# Altium PCB Lantern_REV_B3.PcbDoc (part 2 of 2)
Units mm, origin at the board's own origin, x right, y up, seen from the top; angles counter-clockwise.
Board outline 55 x 135 mm, 4 copper layers (SIG/PWR1, GND1, GND2, SIG/PWR2), stack 1.527 mm thick; 136 components, 65 nets, 452 pads, 147 vias.
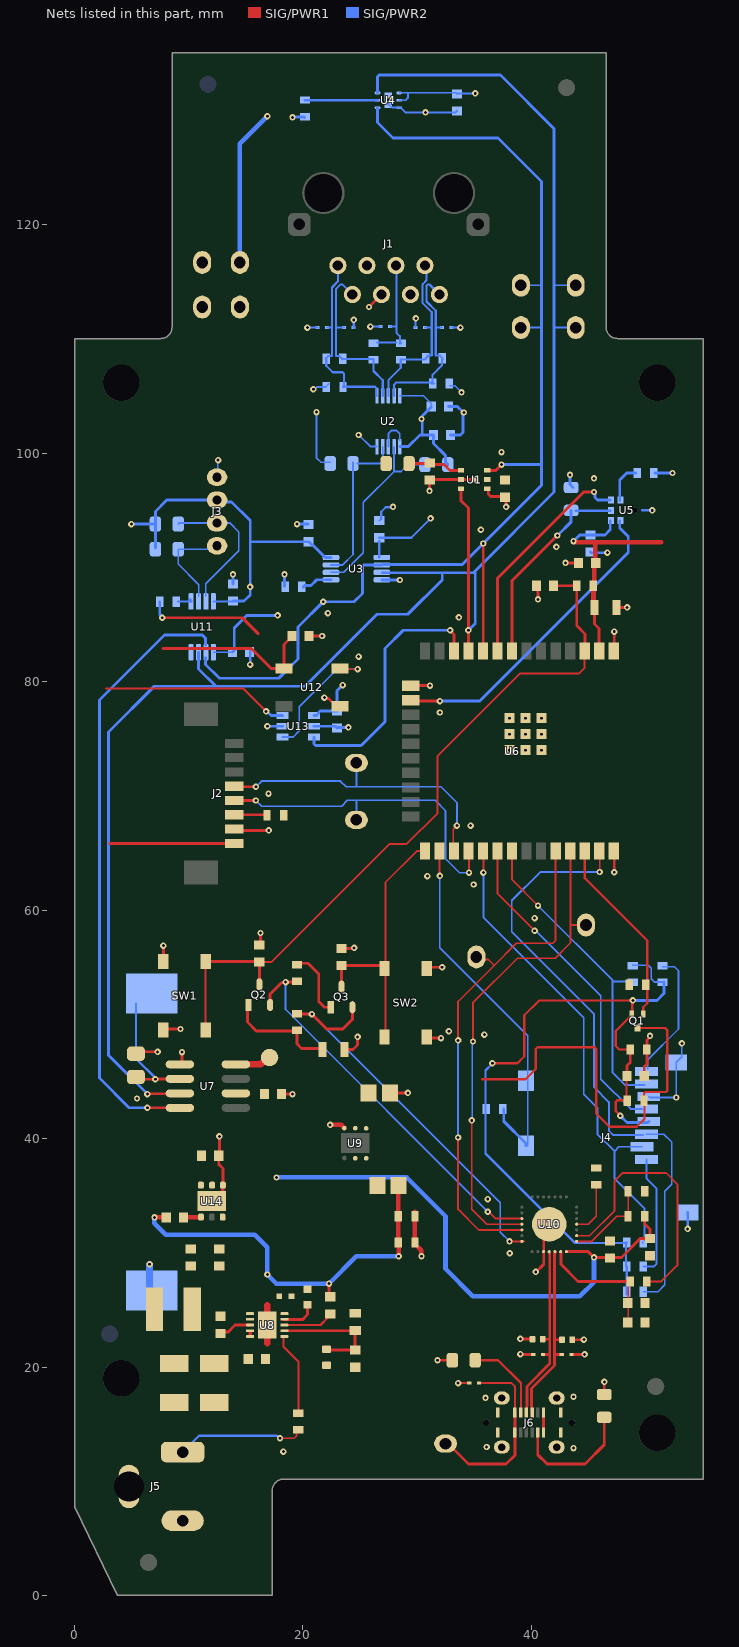
[diagram p4: the nets of this part, all layers, seen from the top]

## Part data
3V3 5V DGND DGND2 RXD0 RXD2 SCL SCL2 SDA SDA2 TXD2 TXDO VBUS: library part CMP-002-00083-1, "Conn Unshrouded Header HDR 1 POS 2.54mm Solder ST Thru-Hole Bag"
BAT1: library part CMP-002-00085-2, "battery holder cr1632"
C1 C2 C9 C13 C14 C22 C38: library part CMP-001-00098-2, "Ceramic Capacitor, Multilayer, Ceramic, 25V, 10% +Tol, 10% -Tol, X7R, 15% TC, 1uF, Surface Mount, 0603", Capacitor Type=Ceramic, Case/Package=0603, Max Operating Temperature=125°C, Min Operating Temperature=-55°C, Mounting Technology="Surface Mount", Pins=2, RoHS Compliant=Yes
C3 C4 C5 C6 C7 C8 C11 C12 C15 C18 C30 C31 C32 C33 C34 C35 C36: library part CMP-001-00099-4, "Ceramic Capacitor, Multilayer, Ceramic, 16V, 10% +Tol, 10% -Tol, X7R, 15% TC, 0.1uF, Surface Mount, 0603", Capacitor Type=Ceramic, Case/Package=0603, Max Operating Temperature=125°C, Min Operating Temperature=-55°C, Mounting Technology="Surface Mount", Pins=2, RoHS Compliant=Yes
C10 C40: library part CMP-001-00091-2, "Ceramic Capacitor, Multilayer, Ceramic, 10V, 20% +Tol, 20% -Tol, X7R, 15% TC, 22uF, Surface Mount, 0805", Capacitor Type=Ceramic, Case/Package=0805, Max Operating Temperature=125°C, Min Operating Temperature=-55°C, Mounting Technology="Surface Mount", Pins=2, RoHS Compliant=Yes
C16 C17: library part CMP-001-00089-3, "Ceramic Capacitor, Multilayer, Ceramic, 25V, 20% +Tol, 20% -Tol, X7R, 15% TC, 10uF, Surface Mount, 1210", Capacitor Type=Ceramic, Case/Package=1210, Max Operating Temperature=125°C, Min Operating Temperature=-55°C, Mounting Technology="Surface Mount", Pins=2, RoHS Compliant=Yes
C19 C20 C21: library part CMP-001-00095-2, "Ceramic Capacitor, Multilayer, Ceramic, 50V, 5% +Tol, 5% -Tol, C0G, 30ppm/Cel TC, 0.000022uF, Surface Mount, 0603", Capacitor Type=Ceramic, Case/Package=0603, Max Operating Temperature=125°C, Min Operating Temperature=-55°C, Mounting Technology="Surface Mount", Pins=2, RoHS Compliant=Yes
C23: library part CMP-001-00096-1, "Ceramic Capacitor, Multilayer, Ceramic, 50V, 5% +Tol, 5% -Tol, C0G, 30ppm/Cel TC, 0.0082uF, Surface Mount, 0603", Capacitor Type=Ceramic, Case/Package=0603, Max Operating Temperature=125°C, Min Operating Temperature=-55°C, Mounting Technology="Surface Mount", Pins=2, RoHS Compliant=Yes
C24 C25: library part CMP-001-00101-1, "Ceramic Capacitor, Multilayer, Ceramic, 16V, 10% +Tol, 10% -Tol, X7R, 15% TC, 10uF, Surface Mount, 0805", Capacitor Type=Ceramic, Case/Package=0805, Max Operating Temperature=125°C, Min Operating Temperature=-55°C, Mounting Technology="Surface Mount", Pins=2, RoHS Compliant=Yes
C26 C27: library part CMP-001-00073-5, "Chip Capacitor, 22pF +/-10%, 50V, 0402, Thickness 0.6 mm", Case/Package=0402, Max Operating Temperature=85°C, Min Operating Temperature=-55°C, Tolerance=10%, Voltage Rating=50V, Mounting Technology=SMT, Pins=2
C28 C29 C39: library part CMP-001-00076-6, "Chip Capacitor, 4.7µF +/-20%, 10V, 0603, Thickness 1 mm", Case/Package=0603, Max Operating Temperature=85°C, Min Operating Temperature=-55°C, Tolerance=10%, Voltage Rating=10V, Mounting Technology=SMT, Pins=2
C37: library part CMP-001-00100-1, "ESD SMD Comm C0G 0805 (2012Metric) Ceramic Capacitor 0.079Lx0.049W 2.00mmx1.25mm C0G NP0 ±10% 1000pF", Case/Package=0805, Tolerance=10%
D1 D2 D3 D4 D5 D6 D7 D8: library part CMP-004-00032-1, "Trans Voltage Suppressor Diode, 5V V(RWM), Bidirectional, 1 Element, Silicon", Max Operating Temperature=150°C, Min Operating Temperature=-55°C, Pins=2, RoHS Compliant=Yes
FM1 FM2 FM3 FM4 FM5 FM6: library part CMP-00030-00004-9, "fiducial marker 2D"
J1: library part CMP-002-00071-6, "Telecom and Datacom Connector, 8 Contact(s), Female, Straight, Solder Terminal, Locking, Jack", Max Operating Temperature=70°C, Min Operating Temperature=-40°C, Connector Type="TELECOM AND DATACOM CONNECTOR", Mounting Technology=Board, RoHS Compliant=Yes
J2: library part CMP-010-00028-3, "PLANTOWER 5003 CONNECTOR - Board Connector, 8 Contact(s), 1 Row(s), Male, Right Angle, 0.049 inch Pitch, Surface Mount Terminal, Locking, Natural Insulator, Receptacle", Max Operating Temperature=85°C, Min Operating Temperature=-40°C, Mounting Technology=Board, RoHS Compliant=Yes
J3: library part CMP-002-00076-3, "K30 cable connector"
J4: library part CMP-002-00080-1, "Micro SD card, push in, push out", Connector Type=PCB, RoHS Compliant=Yes
J5: library part CMP-002-00073-7, "16V, 2.5A, 2mm Dia", Max Current Rating=2.5A, Voltage Rating=16V, Connector Type=Circular,Power, Mounting Technology=Board, RoHS Compliant=Yes
J6: library part CMP-002-00086-1, "USB2.0, Type C, Vertical, Height 6.40mm, Dual Row Surface Mount"
L1: library part CMP-006-00024-1, "High Current Composite Inductor - PA5430/PA5431.XXXNLT and PM5430.XXXNLT, Up to 6.6 Apk", Current Rating=6.6A, Tolerance=20%
NT1: library part CMP-00030-00003-5
P1: library part CMP-00030-00002-1, "a pad to pull out pins"
Q1: library part CMP-013-00037-1, "P-Channel 20 V 600 mA 150 mW Surface Mount Mosfet - SOT-523"
Q2 Q3: library part CMP-013-00035-2, "Small Signal Bipolar Transistor, 1.5A I(C), 25V V(BR)CEO, 1-Element, NPN, Silicon", RoHS Compliant=Yes
R1: library part CMP-009-00185-2, "Fixed Resistor, Metal Glaze/thick Film, 0.25W, 4.7ohm, 150V, 1% +/-Tol, 200ppm/Cel, Surface Mount, 0805", Case/Package=0805, Max Operating Temperature=155°C, Min Operating Temperature=-55°C, Power=250mW, Tolerance=1%, Mounting Technology="Surface Mount", Pins=2, RoHS Compliant=Yes
R2 R3 R8 R9: library part CMP-009-00193-4, "Fixed Resistor, Metal Glaze/thick Film, 0.1W, 590ohm, 75V, 1% +/-Tol, 100ppm/Cel, Surface Mount, 0603", Case/Package=0603, Max Operating Temperature=155°C, Min Operating Temperature=-55°C, Power=100mW, Tolerance=1%, Mounting Technology="Surface Mount", Pins=2, RoHS Compliant=Yes
R4 R5 R34 R35 R43 R44: library part CMP-009-00191-2, "Fixed Resistor, Metal Glaze/thick Film, 0.125W, 5100ohm, 150V, 5% +/-Tol, 100ppm/Cel, Surface Mount, 0805", Case/Package=0805, Max Operating Temperature=155°C, Min Operating Temperature=-55°C, Power=125mW, Tolerance=5%, Mounting Technology="Surface Mount", Pins=2, RoHS Compliant=Yes
R6 R7: library part CMP-009-00194-4, "Fixed Resistor, Metal Glaze/thick Film, 0.1W, 110ohm, 75V, 1% +/-Tol, 100ppm/Cel, Surface Mount, 0603", Case/Package=0603, Max Operating Temperature=155°C, Min Operating Temperature=-55°C, Power=100mW, Tolerance=1%, Mounting Technology="Surface Mount", Pins=2, RoHS Compliant=Yes
R10 R11 R12 R14 R15 R19 R27 R33 R37 R39 R42: library part CMP-009-00204-2, "Fixed Resistor, Metal Glaze/thick Film, 0.1W, 10000ohm, 75V, 1% +/-Tol, 100ppm/Cel, Surface Mount, 0603", Case/Package=0603, Max Operating Temperature=155°C, Min Operating Temperature=-55°C, Power=100mW, Tolerance=1%, Mounting Technology="Surface Mount", Pins=2, RoHS Compliant=Yes
R13: library part CMP-009-00179-2, "Fixed Resistor, Metal Glaze/thick Film, 0.25W, 100000ohm, 200V, 1% +/-Tol, 100ppm/Cel, Surface Mount, 0805", Case/Package=0805, Max Operating Temperature=155°C, Min Operating Temperature=-55°C, Power=250mW, Tolerance=1%, Mounting Technology="Surface Mount", Pins=2, RoHS Compliant=Yes
R18 R30 R36: library part CMP-009-00006-8, "Chip Resistor, 0 Ohm, 0.1 W, -55 to 155 degC, 0603 (1608 Metric)", Case/Package=0603, Max Operating Temperature=155°C, Min Operating Temperature=-55°C, Power=100mW, Tolerance=5%, Voltage Rating=50V, Mounting Technology=SM, Pins=2, RoHS Compliant=True
R20 R41: library part CMP-009-00207-2, "Fixed Resistor, Metal Glaze/thick Film, 0.1W, 2000ohm, 75V, 1% +/-Tol, 100ppm/Cel, Surface Mount, 0603", Case/Package=0603, Max Operating Temperature=155°C, Min Operating Temperature=-55°C, Power=100mW, Tolerance=1%, Mounting Technology="Surface Mount", Pins=2, RoHS Compliant=Yes
R21 R22 R23 R24 R25 R26 R40: library part CMP-009-00197-3, "Fixed Resistor, Metal Glaze/thick Film, 0.33W, 47500ohm, 75V, 1% +/-Tol, 100ppm/Cel, Surface Mount, 0603", Case/Package=0603, Max Operating Temperature=155°C, Min Operating Temperature=-55°C, Power=250mW, Tolerance=1%, Mounting Technology="Surface Mount", Pins=2, RoHS Compliant=Yes
R28: library part CMP-009-00198-1, "Fixed Resistor, Metal Glaze/thick Film, 0.25W, 124000ohm, 75V, 1% +/-Tol, 100ppm/Cel, Surface Mount, 0603", Tolerance=1%
R29: library part CMP-009-00199-1, "Fixed Resistor, Metal Glaze/thick Film, 0.33W, 22100ohm, 75V, 1% +/-Tol, 100ppm/Cel, Surface Mount, 0603", Case/Package=0603, Max Operating Temperature=155°C, Min Operating Temperature=-55°C, Power=250mW, Tolerance=1%, Mounting Technology="Surface Mount", Pins=2, RoHS Compliant=Yes
R38: library part CMP-009-00196-2, "Fixed Resistor, Metal Glaze/thick Film, 0.1W, 22100ohm, 75V, 1% +/-Tol, 100ppm/Cel, Surface Mount, 0603", Case/Package=0603, Max Operating Temperature=155°C, Min Operating Temperature=-55°C, Power=100mW, Tolerance=1%, Mounting Technology="Surface Mount", Pins=2, RoHS Compliant=Yes
SW1 SW2: library part CMP-011-00013-2, "Switch Tactile N.O. SPST Round Button Gull Wing 0.05A 12VDC 200000Cycles 2.45N SMD T/R"
U1: library part CMP-010-00025-3, "Air Quality Gas Sensor Voc/no"
U2: library part CMP-00024-00007-3, "IC Redriver I2C 2CH 10TSSOP"
U3 U11: library part CMP-00024-00006-2, "Interface Circuit, PDSO8", Case/Package=TSSOP, Max Operating Temperature=85°C, Min Operating Temperature=-40°C, Pins=8, RoHS Compliant=Yes
U4: library part CMP-010-00029-2, "Analog Circuit, 1 Func, 1 Channel, PDSO6", Case/Package=HVSON, Max Operating Temperature=85°C, Max Supply Voltage=3.6V, Min Operating Temperature=-40°C, Min Supply Voltage=1.6V, Nominal Supply Voltage=3.3V, Pins=6, RoHS Compliant=Yes
U5: library part CMP-010-00026-5, "MICROPHONE MEMS DIGITAL I2S OMNI"
U6: library part CMP-020-00023-6, "WiFi-Module 802.11/BT 2, 4-2, 5GHz 150Mb/s"
U7: library part CMP-00023-00005-1, "Real Time Clock, Non-Volatile, 1 Timer(s), CMOS, PDSO8", Case/Package=SOP, Max Operating Temperature=85°C, Min Operating Temperature=-45°C, Pins=8, RoHS Compliant=Yes
U8: library part CMP-019-00051-7, "Switching Regulator, Current-mode, 4A, 650kHz Switching Freq-Max, PDSO10", Case/Package=HVSON, Frequency=650kHz, Max Operating Temperature=85°C, Max Supply Voltage=18V, Min Operating Temperature=-40°C, Pins=10, RoHS Compliant=Yes
U9: library part CMP-019-00050-2, "Fixed Positive LDO Regulator, 3.3V, 0.25V Dropout", Case/Package=HVSON, Max Supply Voltage=6V, Pins=6, RoHS Compliant=Yes
U10: library part CMP-00024-00008-3, "USB Bus Controller, CMOS"
U12: library part CMP-00026-00001-3, "WS2812B 5050 RGB LED WITH INTEGRATED DRIVER CHIP PACK OF 10"
U13: library part CMP-015-00009-1, "Bus Transceiver, LVC/LCX/Z Series, 1-Func, 1-Bit, True Output, CMOS, PDSO6", Case/Package=LSSOP, Max Operating Temperature=125°C, Max Supply Voltage=5.5V, Min Operating Temperature=-40°C, Min Supply Voltage=1.65V, Nominal Supply Voltage=3.3V, Pins=6, RoHS Compliant=Yes
U14: library part CMP-019-00053-2, "Fixed Positive LDO Regulator, 5V, 0.6V Dropout", RoHS Compliant=Yes

## Free pads (board coordinates)
  round 3.2 hole 3.2 unplated: MTH(4.098,19.031) MTH(4.098,106.151) MTH(51.018,14.231) MTH(51.018,106.151)

## Via types
v1: diameter 0.56/0.56/0.56/0.56 (per signal layer), hole 0.255, SIG/PWR1 to SIG/PWR2, 82 vias
v2: diameter 0.555, hole 0.255, SIG/PWR1 to SIG/PWR2, 29 vias
v3: diameter 0.56, hole 0.255, SIG/PWR1 to SIG/PWR2, 25 vias
v4: diameter 0.555/0.555/0.555/0.555 (per signal layer), hole 0.255, SIG/PWR1 to SIG/PWR2, 11 vias

## Nets (pads, with @x,y where several pads share a name; then routed paths per layer and width w, separated by ;. In a path a pad name is that pad's centre, name@x,y a point inside that pad or via, vN(x,y) a via of type N, cw(c..) or ccw(c..) an arc to the next point about the centre after c; other vN are vias at no path point)
3.3V: 3V3.1 C2.2 C5.2 C6.2 C7.2 C8.2 C10.2 C14.2 C24.2 C34.2 C36.1 Q1.3 R1.2 R10.1 R11.1 R12.1 R14.1 R15.2 R18.2 R19.1 R33.1 U1.5 U3.1 U4.1 U4.2 U5.5 U6.2 U7.2 U9.1 U9.2 U11.1 U13.1 U13.5 | length 113.7
  SIG/PWR1 w0.2: 35.7,45.2 39.5,45.2 40.4,46.1 40.4,47.854 40.546,48 45.554,48 45.7,47.854 45.7,42.2 46.857,41.043 49.244,41.043 49.925,41.725 R18.2@49.925,43.323 ; Q1.3@49.3,49.68 51.72,49.68 51.9,49.5 51.9,44.192 51.783,44.075 49.992,44.075 49.875,43.957 R18.2@49.875,43.323
  SIG/PWR1 w0.25: v3(7.7,85.6) 14.7,85.6 16.1,84.2 ; C10.2@45.55,86.5 45.55,85.061 45.948,84.663 U6.2@45.948,82.671
  SIG/PWR1 w0.4: v1@43.7,92.2 51.4,92.2 ; C10.2@45.55,86.5 45.454,86.596 45.454,88.371 R15.2@45.425,88.4 45.535,88.51 45.535,90.285 C8.2@45.65,90.4 45.616,90.434 45.616,92.1
  SIG/PWR2 w0.153: U11.1@12.175,82.575 C34.2@13.825,82.575 ; C7.2@33.5,131.45 33.55,131.5 v2(35.1,131.5)
  SIG/PWR2 w0.17: U4.2@28.45,130.9 29,130.9 29.2,131.1 29.2,131.56 ; U4.1@28.472,131.56 29.2,131.56 ; C7.2@33.5,131.45 33.39,131.56 29.2,131.56
  SIG/PWR2 w0.2: U3.1@26.7,90.9 C5.2@26.7,92.3 ; C5.2@26.7,92.6 29.5,92.6 v2(31.2,94.3)
  SIG/PWR2 w0.25: R33.1@7.48,86.995 7.48,85.903 7.7,85.684 v3(7.7,85.6) ; C34.2@13.85,82.6 14,82.75 14,84.7 15.1,85.8 v3(17.8,85.8) ; v3(16.9,76.1) U13.5@18.225,76.1 ; R11.1@18.4,88.35 v3(18.4,89.4) ; v2(19.1,129.4) 19.137,129.437 20.112,129.437 R12.1@20.15,129.4 ; U13.1@20.975,77.05 21.2,77.05 21.375,77.225 21.375,77.297 21.521,77.443 C36.1@22.993,77.443 ; C36.1@23,77.45 23,79.2 v3(23.5,79.7) ; v1(43.7,92.3) 43.703,92.3 44.253,92.85 C6.2@45.2,92.85 46.46,92.85 46.925,93.315 U5.5@46.925,94.068 ; R14.1@50.851,98.271 v2@52.372,98.271
  SIG/PWR2 w0.4: 3V3.1@14.5,116.7 14.5,127.1 v3(16.9,129.5)
  other v2: 52.375,98.274
3.3V_SD: C13.2 J4.4 Q1.2 R18.1 R20.1 R21.2 R22.2 R23.2 R24.2 R25.2 R26.2 | length 68.5
  SIG/PWR1 w0.153: R18.1@48.323,43.425 48.35,43.398 R18.1@48.425,43.323 ; v2@48.85,52.05 v2(48.9,52.1)
  SIG/PWR1 w0.2: v2(36.6,46.6) 38.8,46.6 39.4,47.2 39.4,50.8 40.7,52.1 v2(48.9,52.1) ; v2(47.8,42) 47.413,42.387 47.413,43.229 47.53,43.346 R18.1@48.323,43.346 ; R18.1@48.35,43.323 48.35,43.398 C13.2@48.35,45.48 ; R20.1@48.4,47.8 47.7,47.8 47.4,48.1 47.4,49.42 48.85,50.87 v2@48.85,52.05 ; R20.1@48.513,47.638 R20.1@48.675,47.8
  SIG/PWR1 w0.25: C13.2@48.399,45.481 48.399,46.4 48.675,46.676 R20.1@48.675,47.8
  SIG/PWR2 w0.153: R23.2@48.9,55.2 48.934,55.166 50.24,55.166 50.5,54.906 50.5,54 50.797,53.703 R24.2@51.447,53.703
  SIG/PWR2 w0.2: v2@36.6,46.559 36,45.959 36,38.7 43.829,30.871 48.3,30.871 R25.2@48.3,28.8 ; R21.2@48.229,30.9 R21.2@48.375,30.9 ; R22.2@48.375,26.37 R22.2@48.375,26.6 R25.2@48.375,28.8
  SIG/PWR2 w0.25: v2(47.8,42) 48.4,41.4 50.213,41.4 J4.4@50.298,41.485 ; v2(48.9,52.1) 51,52.1 51.629,52.729 R24.2@51.629,53.725
  SIG/PWR2 w0.4: v2@36.6,46.559 v2(36.6,46.6)
5V: 5V.1 C3.2 C4.2 C29.2 C31.2 C32.2 C33.2 C35.1 C39.2 D3.2 J1.3 J1.4 J1.6 J2.8 J3.3 R2.2 R3.2 R4.2 R5.2 R38.1 R43.2 R44.2 U2.1 U2.3 U2.10 U3.8 U10.7 U11.8 U12.1 U13.6 U14.2 U14.3 | length 152.4
  SIG/PWR1 w0.153: C31.2@50.6,31.35 C31.2@50.65,31.3
  SIG/PWR1 w0.2: 2.8,79.4 14.8,79.4 v3(16.8,77.4)
  SIG/PWR1 w0.25: 3.1,65.85 J2.8@14,65.85 ; 7.777,82.9 15.5,82.9 17.25,81.15 U12.1@18.35,81.15 18.35,83.25 19.05,83.95 C35.1@19.05,84 ; U10.7@43.079,30.102 44.998,30.102 v2(45.5,29.6) 47.9,29.6 49.55,31.25 C31.2@50.4,31.25 50.4,32.062 49.941,32.521 49.941,33.184 R38.1@49.925,33.2
  SIG/PWR2 w0.153: U11.8@12.175,87.025 13.875,87.025 C33.2@13.9,87.05 ; v2(21.2,103.6) 21.2,99.6 21.6,99.2 R4.2@22.4,99.2 ; U2.3@27.5,100.575 27.5,101.7 27.8,102 28.2,102 28.5,101.7 U2.1@28.5,101.1 ; U2.10@28.5,105.025 30.575,105.025 31.25,104.35 C32.2@31.25,104.3
  SIG/PWR2 w0.16: J1.4@27.843,116.516 27.892,116.565 28.024,116.565 J1.4@28.157,116.432
  SIG/PWR2 w0.188: R2.2@26.5,109.7 R3.2@28.2,109.7 ; D3.2@27.645,111.084 28.185,111.084 28.201,111.1 ; J1.4@28.157,116.432 28.201,116.388 28.201,111.1 ; R3.2@28.475,109.625 R3.2@28.6,109.625 ; R3.2@28.537,109.687 28.5,109.725 28.5,110.242 28.201,110.542 28.201,111.1
  SIG/PWR2 w0.25: v3(5,93.8) R44.2@7.1,93.8 ; R43.2@7.1,91.7 R44.2@7.1,93.8 ; C33.2@13.9,87.05 14.85,87.05 15.4,87.6 v3(15.4,88.3) 15.4,92.2 ; v3(16.8,77.4) 16.884,77.4 17.259,77.025 18.2,77.025 U13.6@18.225,77.05 ; C4.2@20.5,92.25 15.45,92.25 15.4,92.2 ; C4.2@20.6,92.2 20.825,91.975 20.875,91.975 21.975,90.875 U3.8@22.475,90.875 ; U2.1@28.5,100.575 29.236,100.575 30.261,101.6 30.458,101.6 ; C32.2@31.25,104.1 31.25,104.05 30.458,103.258 30.458,103.058 v2(30.4,103) 30.458,102.942 30.458,101.6 ; R5.2@32.7,99 32.483,99.217 32.483,99.817 31.45,100.85 C3.2@31.45,101.6 30.458,101.6 ; R44.2@7.1,93.8 7.1,94.9 8.1,95.9 J3.3@12.5,95.9 12.675,95.725 13.775,95.725 15.4,94.1 15.4,92.2
  SIG/PWR2 w0.4: v3(17.7,36.6) 29.1,36.6 32.5,33.2 32.5,28.6 34.9,26.2 44.266,26.2 45.5,27.434 v2(45.5,29.6)
5V_BRRL: C19.1 C20.1 C21.1 C25.2 C38.2 L1.2 R28.1 U9.5 U9.6 U14.4 U14.6 | length 1.3
  SIG/PWR1 w0.4: C38.2@9.8,33.1 9.815,33.115 11.075,33.115 U14.4@11.091,33.131
BCLK: U5.4 U6.16 | length 27.7
  SIG/PWR1 w0.25: U6.16@29.245,78.3 v2(32,78.3)
  SIG/PWR2 w0.25: v2(32,78.3) 35.5,78.3 48.5,91.3 48.5,92.7 47.747,93.453 U5.4@47.747,94.068
CD: J4.9 J4.10 R26.1 U6.26 | length 33
  SIG/PWR1 w0.153: v2@31.978,63.022 U6.26@31.978,65.171
  SIG/PWR1 w0.17: v2@31.978,63.022 v2(32,63)
  SIG/PWR2 w0.153: v2(32,63) 32,56.7 39.698,49.002 39.698,45.075 J4.10@39.698,39.375
  SIG/PWR2 w0.25: R26.1@37.6,42.6 37.6,41.523 39.548,39.575 J4.10@39.548,39.375
CS_MIC: U5.1 U6.9 | length 19.9
  SIG/PWR1 w0.25: U6.9@37.058,82.671 37.058,89.058 44.6,96.6 v2(45.5,96.6)
  SIG/PWR2 w0.17: v2(45.5,96.6) v2@45.574,96.526 ; U5.1@46.887,95.907 U5.1@46.925,95.869
  SIG/PWR2 w0.25: v2@45.574,96.526 45.574,96.126 45.793,95.907 U5.1@46.887,95.907
CS_SDCARD: J4.2 R21.1 U6.29 | length 42.5
  SIG/PWR1 w0.153: v2(35.816,63.279) U6.29@35.816,65.143
  SIG/PWR2 w0.17: v2(35.816,63.279) 35.816,59.384 44.6,50.6 44.6,43.9 45.8,42.7 45.8,40.4 47.3,38.9 ; J4.2@49.698,39.285 47.685,39.285 47.3,38.9 ; R21.1@49.75,30.9 R21.1@49.775,30.925 ; R21.1@49.9,31.1 49.9,33.9 47.3,36.5 47.3,38.9
D_N: C27.2 D7.2 J6.A7 U10.5 | length 16.3
  SIG/PWR1 w0.246: J6.A7@40.076,16.005 40.048,16.032 40.048,16.574 40.025,16.597 40.025,18.132 42.028,20.134 42.028,21.1 ; U10.5@42.079,30.102 42.075,30.097 42.075,29.948 42.031,29.904 42.031,25.138 42.028,25.134 42.028,22.4 ; D7.2@42.674,21.104 42.032,21.104 42.028,21.1 ; C27.2@42.695,22.388 42.04,22.388 42.028,22.4 ; 42.028,21.1 42.028,22.4
D_P: C26.2 D6.2 J6.A6 U10.4 | length 16.3
  SIG/PWR1 w0.246: J6.A6@39.576,16.005 39.603,16.032 39.603,16.574 39.626,16.597 39.626,18.297 41.628,20.3 41.628,21.1 ; D6.2@41.021,21.104 41.624,21.104 41.628,21.1 ; C26.2@41.056,22.4 C26.2@41.014,22.442 41.587,22.442 41.628,22.4 ; U10.4@41.577,30.097 41.582,30.093 41.582,29.952 41.632,29.902 41.632,25.303 41.628,25.3 41.628,22.4 ; 41.628,21.1 41.628,22.4
DGND: BAT1.2 C1.1 C2.1 C3.1 C4.1 C5.1 C6.1 C7.1 C8.1 C9.1 C10.1 C11.2 C12.2 C13.1 C14.1 C24.1 C26.1 C27.1 C28.1 C29.1 C30.1 C31.1 C32.1 C33.1 C34.1 C35.2 C36.2 C37.1 C39.1 C40.1 D1.1 D2.1 D3.1 D4.1 D5.1 D6.1 D7.1 D8.1 DGND2.1 DGND.1 J1.5 J2.7 J3.4 J4.6 J4.11 J4.12 J6.A1 J6.A12 J6.B1 J6.B12 J6.SH1 J6.SH2 J6.SH3 J6.SH4 R8.1 R9.1 R13.1 R20.2 R30.2 R34.1 R35.1 R36.2 R37.1 R40.1 SW1.1 SW1.2 SW2.1 SW2.2 U1.2 U1.4 U1.7 U2.5 U3.4 U4.3 U4.7 U5.3 U6.1 U6.15 U6.38 U6.39_1 U6.39_2 U6.39_3 U6.39_4 U6.39_5 U6.39_6 U6.39_7 U6.39_8 U6.39_9 U7.5 U9.3 U10.3 U10.29 U11.4 U12.3 U13.2 U14.1 U14.7 | length 114
  SIG/PWR1 w0.153: v1(33.6,18.6) D8.1@34.58,18.6 ; v1(36,17.3) v1@36.005,17.295 ; v1(36.1,13) v1@36.105,12.995
  SIG/PWR1 w0.2: C37.1@5.4,47.432 5.665,47.432 5.833,47.6 v1(7.3,47.6) ; v1(31.8,20.6) R35.1@33.1,20.6
  SIG/PWR1 w0.246: v1@39.058,22.454 C26.1@40.103,22.454 ; v1@39.081,21.104 D6.1@40.181,21.104 ; D7.1@43.514,21.104 v1@44.669,21.104 ; C27.1@43.602,22.395 v1@44.609,22.395
  SIG/PWR1 w0.25: SW1.1@7.8,49.5 7.9,49.6 v1(9.3,49.6) ; SW1.2@7.8,55.5 v1(7.8,56.9) ; U7.5@9.25,46.505 9.428,46.683 v1(9.428,47.572) ; U14.7@12.041,34.528 12.263,34.528 U14.7@13.013,35.278 ; v1(12.7,40.2) 12.7,38.55 C39.1@12.65,38.5 12.65,37.75 13.013,37.387 U14.1@13.013,35.925 ; J2.7@14,67.1 14.122,66.978 v1(17.028,66.978) ; C11.2@16.2,56.95 16.3,57.05 v1(16.3,58) ; C14.1@18.027,43.9 C14.1@18.15,43.9 v1(19.1,43.9) ; C35.2@20.55,84 v1(21.7,84) ; v1(21.9,78.6) 21.959,78.541 22.259,78.541 22.95,77.85 U12.3@23.25,77.85 ; C12.2@23.4,56.65 v1@24.45,56.65 ; C40.1@23.65,47.8 24.4,47.8 24.8,48.2 v1(24.8,48.9) ; v1(25.8,112.8) 25.803,112.8 26.887,113.884 J1.5@26.887,113.892 ; C24.1@27.626,44 v1(29.2,44) ; U6.15@29.335,79.7 29.38,79.655 v1(31.145,79.655) ; SW2.2@30.85,48.9 31.079,48.671 31.079,48.704 31.175,48.8 v1(32.1,48.8) ; SW2.1@30.9,54.675 30.9,54.725 31.175,55 v1(32.2,55) ; v1(31.1,96.7) 31.1,97.64 C1.1@31.108,97.648 C1.1@31.108,97.771 ; C1.1@31.181,97.698 U1.2@33.858,97.698 U1.7@35.008,97.698 ; U1.4@36.236,96.823 36.236,96.417 36.455,96.198 C2.1@37.708,96.198 ; C2.1@37.708,96.271 37.8,96.179 v1(37.8,95.3) ; v1(39.046,22.465) v1@39.058,22.454 ; v1(39.054,21.131) v1@39.081,21.104 ; C26.1@40.103,22.454 C26.1@40.114,22.442 ; v4(40.4,28.332) 40.431,28.332 41.1,29 41.1,32 U10.29@41.6,32.5 ; C9.1@40.573,88.4 40.6,88.373 v1(40.6,87.2) ; v1(43,90.4) C8.1@44.15,90.4 ; C27.1@43.595,22.388 C27.1@43.602,22.395 ; v1@44.609,22.395 v1(44.617,22.402) ; v1@44.669,21.104 v1(44.673,21.108) ; R34.1@46.4,17.6 v1(46.4,18.7) ; U6.1@47.218,82.671 47.269,82.722 v1(47.269,84.378) ; v1(47.27,63.316) U6.38@47.27,64.812 ; C10.1@47.45,86.5 v1(48.4,86.5) ; R40.1@49.85,35.4 R40.1@49.925,35.4 R40.1@50,35.4 ; C28.1@49.9,23.9 C28.1@49.9,23.95 ; C30.1@49.9,25.55 C30.1@49.95,25.6 ; C13.1@49.9,45.48 49.9,46.3 50.125,46.525 R20.2@50.125,47.8 50.125,48.641 50.4,48.916 v1(50.4,49)
  SIG/PWR1 w0.3: U14.7@13.013,35.278 U14.1@13.013,35.925
  SIG/PWR1 w0.4: v1(22.4,41.2) 23.371,41.2 U9.3@23.65,40.921 ; R30.2@29.825,33.6 29.79,33.565 29.79,30.935 R36.2@29.825,30.9 29.825,30.775 30.369,30.231 30.369,29.731 v1(30.4,29.7)
  SIG/PWR2 w0.153: J3.4@12.5,97.9 12.55,97.95 12.55,99.35 v1(12.6,99.4) ; C4.1@20.45,93.8 C4.1@20.5,93.75 ; v1(20.936,105.603) 21.046,105.603 21.243,105.8 22.001,105.8 R8.1@22.26,106.059 ; D1.1@24.47,110.99 D1.1@24.5,110.96 ; v1(24.9,101.6) 25.9,100.6 26.427,100.6 26.451,100.575 U2.5@26.5,100.575 ; C5.1@26.7,94.1 C5.1@26.869,94.269 ; U4.7@27.5,130.9 27.5,130.55 27.787,130.263 28.437,130.263 U4.3@28.45,130.25 28.575,130.25 28.991,129.834 v1(30.744,129.834) 33.384,129.834 C7.1@33.5,129.95 C7.1@33.45,130 ; v1@27.878,95.278 v1(27.9,95.3) ; v1@29.88,111.78 v1(29.9,111.8) ; R9.1@32.9,105.9 33.332,105.9 v1(33.9,105.332) ; J4.6@50.298,43.685 50.383,43.6 v1(52.7,43.6) 52.7,46.673 J4.11@52.698,46.675 53.187,47.164 v1(53.187,48.335)
  SIG/PWR2 w0.188: v1(20.4,111) D2.1@21.28,111 ; D1.1@24.47,110.99 v1(24.47,111.67) ; v1(25.926,111.084) D3.1@26.806,111.084 ; D5.1@29.88,111 v1@29.88,111.78 ; D4.1@33.02,111 v1(33.8,111)
  SIG/PWR2 w0.2: C5.1@26.869,94.269 26.869,94.869 27.278,95.278 v1@27.878,95.278 ; U5.3@49.722,95.015 50.585,95.015 v1(50.6,95)
  SIG/PWR2 w0.25: C33.1@13.9,88.55 v1(13.9,89.4) ; v1(15.4,81.5) C34.1@15.4,82.65 ; v1(19.5,93.8) C4.1@20.45,93.8 ; U13.2@20.975,76.1 22.85,76.1 C36.2@23,75.95 23.05,76 v1(24,76) ; U3.4@26.925,88.925 26.937,88.912 28.487,88.912 v1(28.5,88.9) ; C32.1@32.75,104.1 33.529,104.1 34.061,103.568 v1(34.1,103.568) 34.041,103.509 34.041,101.841 33.8,101.6 C3.1@32.95,101.6 ; v1(43.4,98.1) 43.4,97.25 R13.1@43.65,97 ; C6.1@45.2,91.35 45.258,91.292 v1(46.663,91.292) ; J4.12@53.698,33.525 J4.12@53.698,33.525 v1(53.7,32.1)
  SIG/PWR2 w0.6: v1(6.6,29) 6.6,26.9 BAT1.2@6.8,26.7
  other v1: 18.3,12.6 43.7,12.9 43.7,17.4 38.124,29.965 36.2,34.7 5.489,43.511 35.9,49.1 32.8,49.4 24.5,56.7 40.3,59.3 34.962,62.242 30.907,62.983 34.7,67.4 17,70.2 32,77.3 24.9,82.2 33.669,85.629 22.2,86 42.2,91.8 35.6,93.3 45.5,97.8 37.4,100.1
  other v4: 38.1,74 39.5,74 40.9,74 38.1,75.4 39.5,75.4 40.9,75.4 38.1,76.8 39.5,76.8 40.9,76.8 27.502,130.945
DTR: Q3.2 R39.2 U10.28 | length 35.1
  SIG/PWR1 w0.153: v2(38.1,31) 39.375,31
  SIG/PWR1 w0.25: R39.2@19.5,50.925 19.512,50.912 20.787,50.912 22.1,49.6 23.5,49.6 24.35,50.45 Q3.2@24.35,51.499
  SIG/PWR2 w0.153: v2(20.8,50.9) 37.3,34.4 37.3,31.8 v2(38.1,31)
ENABLE: C9.2 C11.1 Q2.3 R15.1 SW1.3 SW1.4 U6.3 | length 64.2
  SIG/PWR1 w0.17: SW1.3@11.5,49.5 SW1.4@11.5,55.5 ; C11.1@16.2,55.45 17.25,55.45 27.6,65.8 29.1,65.8 31.8,68.5 31.8,73.5 39,80.7 44.16,80.7 44.678,81.218 U6.3@44.678,82.671
  SIG/PWR1 w0.25: SW1.4@11.5,55.5 16.15,55.5 C11.1@16.2,55.45 ; Q2.3@16.2,53.501 C11.1@16.2,55.32 ; C9.2@41.827,88.4 R15.1@43.85,88.4 ; R15.1@43.991,88.384 43.991,84.909 44.716,84.184 44.716,82.814 U6.3@44.88,82.65
GND: C23.1 NT1.2 R29.1 U8.5
IO0: C12.1 Q3.3 SW2.3 SW2.4 U6.25 | length 24.6
  SIG/PWR1 w0.153: SW2.4@27.245,48.7 27.245,54.9 27.245,62.445 29.971,65.171 U6.25@30.505,65.171
  SIG/PWR1 w0.17: U6.25@30.505,65.105 30.708,65.105 U6.25@31.065,65.105 ; U6.25@30.505,65.171 U6.25@30.708,65.171
  SIG/PWR1 w0.25: Q3.3@23.4,53.301 C12.1@23.4,55.15 26.9,55.15 SW2.3@27.15,54.9
LED: U6.12 U13.3 | length 22.5
  SIG/PWR1 w0.153: v3@32.9,84.476 v3(32.9,84.5)
  SIG/PWR1 w0.25: v3@32.9,84.476 33.248,84.128 U6.12@33.248,82.671
  SIG/PWR2 w0.25: U13.3@20.975,75.15 20.975,74.562 21.121,74.416 25.116,74.416 27.2,76.5 27.2,82.9 28.8,84.5 v3(32.9,84.5)
MISO: J4.7 R23.1 U6.31 | length 28.1
  SIG/PWR1 w0.153: U6.31@38.328,65.171 38.328,62.672 v2(40.6,60.4)
  SIG/PWR2 w0.153: v2(40.6,60.4) 47.1,53.9 47.25,53.75 R23.1@48.9,53.75
  SIG/PWR2 w0.17: 47.1,53.9 47.1,45.8 48.2,44.7 J4.7@49.9,44.7
MOSI: J4.3 R22.1 U6.37 | length 54.5
  SIG/PWR1 w0.153: v2(45.991,63.338) U6.37@45.991,64.9
  SIG/PWR2 w0.153: R22.1@49.825,26.6 51.1,26.6 51.7,27.2 51.7,35.4 52.3,36 52.3,39.7 51.615,40.385 J4.3@50.098,40.385
  SIG/PWR2 w0.17: v2(45.991,63.338) 40.793,63.338 38.3,60.846 38.3,58.1 45.5,50.9 45.5,44.5 46.8,43.2 46.8,40.7 47.2,40.3 J4.3@49.8,40.3
NetBAT1_1: BAT1.1 C37.2 U7.6 | length 11.3
  SIG/PWR1 w0.25: C37.2@5.4,45.4 5.6,45.2 v3(7.1,45.2) 7.118,45.218 9.233,45.218 U7.6@9.25,45.235
  SIG/PWR2 w0.2: BAT1.1@5.4,51.8 5.4,47 7.1,45.3 v3(7.1,45.2)
NetC1_2: C1.2 R1.1 U1.1 | length 4.7
  SIG/PWR1 w0.25: R1.1@29.308,99.098 C1.2@31.035,99.098 ; C1.2@31.108,99.025 32.375,99.025 32.5,98.9 32.902,98.498 U1.1@33.858,98.498 U1.1@33.84,98.516
NetC15_1: C15.1 L1.1 U8.6 U8.7
NetC15_2: C15.2 U8.8 | length 3
  SIG/PWR1 w0.254: C15.2@12.8,22.95 12.932,23.082 13.482,23.082 14.079,23.679 U8.8@15.481,23.679
NetC16_2: C16.2 C17.2 C18.2 J5.1 R27.2 U8.9 U8.10 | length 11.8
  SIG/PWR1 w0.153: v2(18.014,13.768) 19.232,13.768 19.46,13.997 19.46,14.276 19.608,14.425 R27.2@19.825,14.425
  SIG/PWR1 w0.3: U8.10@15.394,22.779 U8.9@15.394,23.079
  SIG/PWR2 w0.2: J5.1@9.488,12.553 10.935,14 17.72,14 17.951,13.768 v2(18.014,13.768)
NetC21_2: C21.2 R28.2 R29.2 U8.2 | length 10.5
  SIG/PWR1 w0.254: U8.2@18.289,23.179 U8.2@18.394,23.179 R29.2@24.6,23.179 ; R28.2@22.083,21.567 22.166,21.484 C21.2@24.592,21.484 ; R29.2@24.4,23.15 24.592,22.958 C21.2@24.592,21.626
NetC22_2: C22.2 U8.3 | length 4.7
  SIG/PWR1 w0.2: U8.3@18.271,23.679 18.275,23.675 21.55,23.675 22.198,24.323 C22.2@22.198,24.873
NetC23_2: C23.2 U8.4 | length 3.2
  SIG/PWR1 w0.25: U8.4@18.271,24.179 19.996,24.179 20.432,24.615 C23.2@20.432,25.464
NetC28_2: C28.2 C30.2 R41.2 U10.6 | length 11
  SIG/PWR1 w0.153: C30.2@48.4,25.65 C30.2@48.45,25.6 ; C28.2@48.5,23.9 R41.2@48.5,27.2
  SIG/PWR1 w0.25: U10.6@42.6,30.1 42.6,29 44.1,27.5 R41.2@48.5,27.5
NetC40_2: C40.2 Q2.1 R39.1 | length 10
  SIG/PWR1 w0.25: Q2.1@15.25,51.437 Q2.1@15.25,51.699 15.154,51.603 15.154,51.437 15.154,50.204 15.931,49.427 19.452,49.427 R39.1@19.5,49.475 ; R39.1@19.5,49.35 19.5,48.3 19.9,47.9 21.65,47.9 C40.2@21.75,47.8
NetJ2_6: J2.6 R10.2 | length 2.9
  SIG/PWR1 w0.25: J2.6@14,68.35 R10.2@16.875,68.35
NetJ4_1: J4.1 R25.1 | length 10.7
  SIG/PWR2 w0.17: R25.1@49.825,28.8 50.717,28.8 50.972,29.055 50.972,35.628 50.098,36.502 J4.1@50.098,38.185
NetJ4_8: J4.8 R24.1 | length 11.3
  SIG/PWR2 w0.153: J4.8@50.2,46.1 50.2,46.9 52.9,49.6 52.9,54.7 52.55,55.05 R24.1@51.5,55.05
NetJ6_A5: J6.A5 R35.2 | length 7.2
  SIG/PWR1 w0.2: R35.2@35.1,20.6 37.1,20.6 39.1,18.6 J6.A5@39.1,16.181
NetJ6_A9: J6.A9 J6.B4 | length 1.7
  SIG/PWR1 w0.25: J6.B4@41.076,14.275 J6.A9@41.076,16.005
NetJ6_B5: J6.B5 R34.2 | length 11
  SIG/PWR1 w0.25: J6.B5@40.576,14.275 40.576,12.324 41.4,11.5 44.7,11.5 46.4,13.2 R34.2@46.4,15.414
NetP1_1: P1.1 U7.4 | length 3.2
  SIG/PWR1 w0.6: U7.4@14.15,46.505 16.3,46.505 16.895,47.1 P1.1@17.1,47.1
NetQ3_1: Q3.1 R42.1 | length 6
  SIG/PWR1 w0.25: R42.1@19.5,55.35 20.45,55.35 21.4,54.4 21.4,52 21.9,51.5 Q3.1@22.45,51.499
NetR11_2: R11.2 U3.5 | length 2.7
  SIG/PWR2 w0.25: R11.2@20.05,88.3 20.179,88.429 20.729,88.429 21.225,88.925 U3.5@22.475,88.925
NetR12_2: R12.2 U4.5 | length 6.3
  SIG/PWR2 w0.25: R12.2@20.2,130.9 U4.5@26.55,130.9
NetR14_2: R14.2 U5.2 | length 3.4
  SIG/PWR2 w0.25: U5.2@47.747,95.868 47.747,97.647 48.371,98.271 R14.2@49.151,98.271
NetR27_1: R27.1 U8.1 | length 7.4
  SIG/PWR1 w0.2: U8.1@18.29,22.679 18.315,22.654 18.315,21.785 19.625,20.475 R27.1@19.625,15.8
NetR33_2: R33.2 U11.5 | length 1.4
  SIG/PWR2 w0.153: R33.2@9.05,87 9.075,87.025 U11.5@10.225,87.025
  SIG/PWR2 w0.25: U11.5@10.125,87.2 10.225,87.1 U11.5@10.225,87.025
NetR37_2: R37.2 U10.11 | length 4.7
  SIG/PWR1 w0.153: U10.11@43.986,32.506 45.006,32.506 45.7,33.2 R37.2@45.7,35.85
NetR38_2: R38.2 R40.2 U10.8 | length 7.7
  SIG/PWR1 w0.153: U10.8@43.979,31.002 45.302,31.002 47.5,33.2 R38.2@48.475,33.2 48.5,33.225 48.5,35.4 R40.2@48.575,35.475
NetR41_1: R41.1 U10.9 | length 23.1
  SIG/PWR1 w0.153: U10.9@43.979,31.502 45.102,31.502 47.3,33.7 47.3,36.3 48,37 51.8,37 52.8,36 52.8,28.9 51.4,27.5 R41.1@50.4,27.5
NetU12_4: U12.4 U13.4 | length 11.8
  SIG/PWR1 w0.153: U12.4@23.25,81.15 23.3,81.1 v3(24.8,81.1)
  SIG/PWR2 w0.153: U13.4@18.225,75.15 19.15,75.15 19.7,75.7 19.7,77.8 23,81.1 v3(24.8,81.1)
PGND: C16.1 C17.1 C18.1 C19.2 C20.2 C22.1 C25.1 C38.1 J5.2 J5.3 NT1.1 R30.1 R36.1 U8.11 | length 38.4
  SIG/PWR1 w0.25: C22.1@22.21,26.139 22.3,26.229 v2(22.3,27.3)
  SIG/PWR1 w0.4: v3(7.027,33.1) C38.1@8.05,33.1 C38.1@8.173,33.1 ; 16.894,22.106 16.9,22.1 ; 16.894,25.394 16.9,25.4 ; v3(28.4,29.7) 28.387,29.712 28.387,30.887 R36.1@28.375,30.9 28.375,33.6 28.375,35.875 C25.1@28.4,35.9
  SIG/PWR1 w0.6: 16.894,22.106 U8.11@16.894,23.679 16.894,25.394
  SIG/PWR2 w0.4: v3@7,33.026 7,32.6 8,31.6 15.8,31.6 16.9,30.5 v2(16.9,28.1) 17.7,27.3 v2(22.3,27.3) 24.7,29.7 v3@28.474,29.7
PLNTWR_RX: J2.5 TXD2.1 U6.28 | length 29.6
  SIG/PWR1 w0.153: v3(34.559,63.279) U6.28@34.559,65.13
  SIG/PWR1 w0.25: J2.5@14,69.6 v3(15.9,69.6)
  SIG/PWR2 w0.153: v3(15.9,69.6) 16.4,69.1 23.4,69.1 23.914,69.614 24.7,69.614 ; TXD2.1@24.7,67.9 24.7,69.614 ; v3(34.559,63.279) 33.721,63.279 32.5,64.5 32.5,68.7 31.586,69.614 24.7,69.614
PLNTWR_TX: J2.4 RXD2.1 U6.27 | length 27
  SIG/PWR1 w0.153: U6.27@33.248,65.171 33.183,65.236 33.183,67.083 v3(33.5,67.4)
  SIG/PWR1 w0.25: J2.4@14,70.85 14.05,70.8 v3(15.9,70.8)
  SIG/PWR2 w0.153: v3(15.9,70.8) 16.4,71.3 23.3,71.3 23.8,70.8 24.675,70.8 ; RXD2.1@24.7,72.9 24.7,70.825 24.675,70.8 ; v3(33.5,67.4) 33.5,69.4 32.1,70.8 24.675,70.8
RTS: Q2.2 R42.2 U10.24 | length 34.4
  SIG/PWR1 w0.153: R42.2@19.45,53.7 R42.2@19.5,53.65 ; v2(36.2,33.6) 36.289,33.6 36.889,33 U10.24@39.179,33
  SIG/PWR1 w0.25: Q2.2@17.15,51.699 17.15,52.65 18.142,53.642 18.442,53.642 v2(18.5,53.7) R42.2@19.45,53.7
  SIG/PWR2 w0.153: v2(18.5,53.7) 18.5,51.3 v2(36.2,33.6)
SCK: J4.5 U6.30 | length 28.5
  SIG/PWR1 w0.153: U6.30@37.058,65.171 37.058,61.442 v2(40.3,58.2)
  SIG/PWR2 w0.153: v2(40.3,58.2) 40.4,58.2 46.1,52.5 46.1,45.2 48.7,42.6 J4.5@49.7,42.6
SCL: SCL2.1 SCL.1 U1.6 U3.2 U4.4 U6.10 U7.8 U11.2 | length 156.6
  SIG/PWR1 w0.25: v3(6.4,42.7) 6.402,42.698 9.247,42.698 U7.8@9.25,42.695 ; U6.10@35.788,82.671 35.8,82.683 v3(35.8,92.1) ; U1.6@36.158,98.498 36.898,98.498 v3(37.4,99)
  SIG/PWR2 w0.153: SCL.1@39.1,111 40.8,111 40.9,111.1 ; SCL2.1@39.1,114.7 40.8,114.7 40.9,114.8
  SIG/PWR2 w0.25: v3(6.4,42.7) 4.8,42.7 2.2,45.3 2.2,78.4 7.9,84.1 11.2,84.1 11.5,83.8 U11.2@11.5,83.2 ; U11.2@11.5,82.1 11.5,81.5 12.7,80.3 17.9,80.3 19.6,82 19.6,84.8 v3(21.8,87) 24.5,87 25.225,87.725 25.225,90.125 25.325,90.225 U3.2@26.925,90.225 26.962,90.262 33.963,90.262 v3(35.8,92.1) 40.9,97.2 40.9,99 ; U4.4@26.55,130.25 26.55,128.95 27.9,127.6 37.1,127.6 40.9,123.8 40.9,114.8 40.9,111.1 40.9,99 ; v3(37.4,99) 40.9,99
SCL_5V: R4.1 U2.4 U3.7 | length 13.9
  SIG/PWR2 w0.153: U3.7@22.475,90.225 23.493,90.225 24.4,91.132 R4.1@24.4,99.2 ; R4.1@24.8,99.1 26.8,99.1 27,99.3 U2.4@27,100.575
SCL_K30: J3.2 R44.1 U11.7 | length 12.5
  SIG/PWR2 w0.153: R44.1@9.1,93.8 9.2,93.9 J3.2@12.5,93.9 13.6,93.9 14.4,93.1 14.4,91.46 11.5,88.56 U11.7@11.5,87.5
SCL_N: D2.2 J1.2 R7.1 R8.2 U2.6 | length 16.6
  SIG/PWR2 w0.188: D2.2@22.12,111 22.558,111 ; J1.2@23.077,116.432 23.077,115.027 22.558,114.508 22.558,111 ; R8.2@23.525,105.8 23.539,105.814 26.334,105.814 26.444,105.704 26.444,105.081 U2.6@26.5,105.025 ; R8.2@23.6,105.786 23.6,106.981 23.49,107.091 22.618,107.091 22.062,107.648 22.062,108.201 21.994,108.269 22.224,108.5 22.558,108.5 22.558,111
SCL_P: D1.2 J1.1 R2.1 R7.2 U2.7 | length 15.4
  SIG/PWR2 w0.188: R7.2@23.444,108.2 23.444,108.269 23.213,108.5 22.9,108.5 22.9,111 ; R7.2@23.525,108.234 R2.1@26.2,108.234 ; D1.2@23.6,111 22.9,111 ; J1.1@24.347,113.892 24.347,113.904 23.471,114.78 23.314,114.78 22.9,114.366 22.9,111 ; R2.1@26.2,108.175 26.2,107.2 27,106.4 U2.7@27,105.025
SD: R13.2 U5.6 U6.8 | length 17.5
  SIG/PWR1 w0.25: U6.8@38.328,82.671 38.328,88.838 v2(42.287,92.797)
  SIG/PWR2 w0.25: v2(42.287,92.797) 42.297,92.797 43.5,94 R13.2@43.5,95 ; R13.2@43.9,94.968 U5.6@46.925,94.968
SD_PWR: Q1.1 R19.2 U6.36 | length 16.5
  SIG/PWR1 w0.2: U6.36@44.7,65.066 44.7,62.8 50.15,57.35 50.15,53.475 50.15,51.85 49.8,51.5 Q1.1@49.8,50.92
SDA: SDA2.1 SDA.1 U1.3 U3.3 U4.6 U6.11 U7.7 U11.3 | length 167.4
  SIG/PWR1 w0.25: v3(6.4,43.9) 6.433,43.933 9.217,43.933 U7.7@9.25,43.965 ; U1.3@33.858,96.898 33.858,95.842 34.5,95.2 v3(34.5,84.5) 34.5,82.689 U6.11@34.518,82.671
  SIG/PWR2 w0.153: 42,111 SDA.1@43.9,111 ; 42,114.8 42.1,114.7 SDA2.1@43.9,114.7
  SIG/PWR2 w0.25: v3(6.4,43.9) 3,47.3 3,75.6 7,79.6 12.4,79.6 ; U11.3@10.875,82.575 10.875,81.125 12.4,79.6 ; U4.6@26.55,131.55 26.55,132.954 26.696,133.1 37.3,133.1 42,128.4 42,114.8 42,114.7 42,111 42,96.6 35.1,89.7 ; U3.3@26.962,89.537 32.172,89.537 ; v3(34.5,84.5) 35.1,85.1 35.1,89.7 ; 12.4,79.6 20.2,79.6 26.5,85.9 29.2,85.9 32.209,88.909 32.209,89.5 32.172,89.537 ; 32.172,89.537 34.937,89.537 35.1,89.7
SDA_5V: R5.1 U2.2 U3.6 | length 16.9
  SIG/PWR2 w0.153: U3.6@22.475,89.575 23.575,89.575 25.3,91.3 25.3,95.7 28,98.4 ; U2.2@28,100.575 28,98.4 ; R5.1@30.7,99 29.2,99 28.6,98.4 28,98.4
SDA_K30: J3.1 R43.1 U11.6 | length 8.4
  SIG/PWR2 w0.153: U11.6@10.9,87.5 10.9,88.5 9.1,90.3 R43.1@9.1,91.6 11.686,91.6 11.986,91.9 J3.1@12.5,91.9
SDA_N: D4.2 J1.7 R6.1 R9.2 U2.9 | length 16.3
  SIG/PWR2 w0.188: U2.9@28,105.025 28,106 28.2,106.2 R9.2@31.3,106.2 ; R9.2@31.3,106.1 R9.2@31.475,106.1 ; R9.2@31.375,106.1 31.375,106.2 31.375,106.875 32.193,107.693 32.193,108.168 32.225,108.2 32.225,108.325 31.994,108.556 31.651,108.556 31.642,108.564 31.642,111.044 ; J1.7@31.967,113.892 31.967,113.904 31.102,114.769 30.946,114.769 30.836,114.658 30.836,113.284 31.642,112.477 31.642,111.044 ; D4.2@32.18,111 31.686,111 31.642,111.044
SDA_P: D5.2 J1.8 R3.1 R6.2 U2.8 | length 15.4
  SIG/PWR2 w0.16: D5.2@30.72,111 D5.2@30.74,111.02
  SIG/PWR2 w0.188: U2.8@27.5,105.025 27.5,106.4 28.581,107.481 28.581,108.156 R3.1@28.6,108.175 ; R3.1@28.581,108.221 30.683,108.221 R6.2@30.778,108.315 ; J1.8@30.697,116.432 30.839,116.29 30.839,115.145 30.493,114.8 30.493,113.142 31.3,112.336 31.3,110.973 ; D5.2@30.72,111 31.273,111 31.3,110.973 ; R6.2@30.834,108.384 31.006,108.556 31.291,108.556 31.3,108.564 31.3,110.973
USB_RX: TXDO.1 U6.35 U10.25 | length 43.2
  SIG/PWR1 w0.153: v2(34.8,41.6) 34.8,33.8 36.1,32.5 U10.25@39.181,32.501 ; v2(34.9,48.5) 34.9,51.9 38.8,55.8 42.1,55.8 43.436,57.136 43.436,58.7 ; U6.35@43.408,65.171 43.436,65.143 43.436,58.7 ; TXDO.1@44.8,58.7 43.436,58.7
  SIG/PWR2 w0.153: v2(34.8,41.6) 34.85,41.65 34.85,48.45 v2(34.9,48.5)
USB_TX: RXD0.1 U6.34 U10.26 | length 45
  SIG/PWR1 w0.153: v2(33.6,40.1) 33.6,33.8 35.4,32 U10.26@39.179,32 ; v2(33.6,48.6) 33.6,52 36.75,55.15 ; RXD0.1@35.2,55.9 35.415,55.685 36.214,55.685 36.75,55.15 ; U6.34@42.138,65.171 42.138,57.338 41.9,57.1 38.7,57.1 36.75,55.15
  SIG/PWR2 w0.153: v2(33.6,40.1) v2(33.6,48.6)
VUSB_5V: D8.2 J6.A4 J6.B9 VBUS.1 | length 17
  SIG/PWR1 w0.153: D8.2@35.42,18.6 38.3,18.6 38.576,18.324 J6.A4@38.576,16.005
  SIG/PWR1 w0.25: VBUS.1@32.5,13.3 32.715,13.3 34.515,11.5 37.8,11.5 38.576,12.276 J6.B9@38.576,14.275 J6.A4@38.576,16.005
  SIG/PWR2 w0.4: VBUS.1@32.5,13.3 VBUS.1@33.032,13.3
pads on no net: FM1.0 FM2.0 FM3.0 FM4.0 FM5.0 FM6.0 J1.0 J2.0 J2.1 J2.2 J2.3 J6.0 J6.A8 J6.B6 J6.B7 J6.B8 U5.0 U6.4 U6.5 U6.6 U6.7 U6.13 U6.14 U6.17 U6.18 U6.19 U6.20 U6.21 U6.22 U6.23 U6.24 U6.32 U6.33 U7.1 U7.3 U9.4 U9.7 U10.1 U10.2 U10.10 U10.12 U10.13 U10.14 U10.15 U10.16 U10.17 U10.18 U10.19 U10.20 U10.21 U10.22 U10.23 U10.27 U12.2 U14.5

## Polygon pours and split planes (outlines as drawn)
3.3V on SIG/PWR1 "3.3V_L01_P027" (solid, remove dead copper, pour order 27): 3.758,41.9 20,41.9 24.3,41.9 24.3,40.4 26.7,40.4 26.7,44 35.1,44 38.5,47.4 38.5,51.8 39.35,52.65 49.3,52.65 49.3,54.3 38.9,54.3 37.1,52.5 37.1,48.1 35.8,46.8 25.7,46.8 25.7,57.5 25.7,93.7 51.052,93.7 51.027,90.7 55.104,90.7 55.158,135.043 15.9,135.043 15.9,128.3 38.2,128.3 43.9,122.6 43.9,100.9 15.9,100.9 15.9,61.6 3.758,61.6
DGND on SIG/PWR1 "DGND_L01_P034" (solid, remove dead copper, pour order 34): 0.964,137.9 55.058,137.9 55.058,3.442 61.8,-3.3 59.1,-6 -0.038,-6
NetC16_2 on SIG/PWR1 "NETC16_2_L01_P032" (solid, pour order 32): 0.3,21.6 7.1,21.6 14.4,21.6 14.4,23.3 15.8,23.3 15.8,19.5 15.3,19 6.6,19 6.6,14.1 12.2,14.1 12.2,11.3 0.3,11.3
PGND on SIG/PWR1 "PGND_L01_P028" (solid, pour order 28): 18,25.7 18,29.6 8.7,29.6 8.7,27.536 15.8,27.536 15.8,17.9 7,17.9 7,15.6 12.9,15.6 12.9,8 6.175,8 6.175,12 3.333,12 3.333,6.992 5.325,5 13.275,5 15.1,6.825 15.1,13.6 18,16.5
5V on SIG/PWR1 "5V_L01_P025" (solid, pour order 25): 18.327,107.373 19.5,106.2 40.6,106.2 40.6,102.6 9.7,102.6 9.7,96.959 14.1,96.959 14.1,94.8 9,94.8 5.8,91.6 5.8,84.4 10.4,84.4 10.4,82.3 3.758,82.3 3.758,41.7 18.6,41.7 18.6,35.1 0.1,35.1 0.1,110 0.2,110.1 7.7,110.1 7.7,134.9 7.8,135 15.7,135 15.7,119.8 28.1,119.8 29.5,118.4 29.5,115.5 30.5,114.5 30.5,113 30.1,112.6 28.5,112.6 28.2,112.9 28.2,114.7 27.7,115.2 24.8,115.2 24.4,115.6 24.4,117.4 23.9,117.9 19.8,117.9 19.8,117.873 18.327,116.4
5V_BRRL on SIG/PWR1 "5V_BRRL_L01_P026" (solid, pour order 26): 25.6,18.8 26.9,20.1 26.9,38.533 24.1,38.533 24.1,31.471 13.6,31.471 13.6,33.4 13.4,33.6 10.7,33.6 10.5,33.4 10.5,31.471 0.1,31.471 0.1,22.6 8.2,22.6 8.2,29.8 23.618,29.8 25.7,27.718 25.7,21.4 25,20.7 21.733,20.7 21.3,20.267 21.3,19.1 21.6,18.8
GND on SIG/PWR1 "GND_L01_P031" (solid, pour order 31): 21.1,27.808 22.592,27.808 23.8,26.6 23.8,24.1 25.6,24.1 25.6,27.6 23.5,29.7 18.7,29.7 18.7,25.011 18.187,25.011 18.187,24.545 18.191,24.541 19.541,24.541 19.7,24.7 19.7,26.2 21.1,26.2
DGND on GND2 "DGND_L03_P029" (solid, pour order 29): -7.9,138.2 -7.7,138.4 60.7,138.4 60.7,-6.2 57.9,-9 -4.6,-9
DGND on GND1 "DGND_L02_P030" (solid, pour order 30): -5.6,140.4 67.4,140.4 69.3,138.5 63.4,132.6 63.4,-3.7 -1.832,-3.7 -8.7,-10.568
DGND on SIG/PWR2 "DGND_L04_P033" (solid, pour order 33): 7.966,135.256 46.166,135.256 48.366,133.056 48.366,110.656 54.366,110.656 54.924,110.098 54.924,-3.144 1.666,-3.144 -3.434,1.956 -2.734,2.656 -2.734,134.556

## Other copper
SIG/PWR1:
  region net NetC15_1: 15.813,24.038 10.145,24.038 10.145,25.1 15.813,25.1
GND1:
  pour cut-out: 14.9,25.4 14.9,21.9 19,21.9 19,25.4
GND2:
  pour cut-out: 14.9,25.4 14.9,21.9 19,21.9 19,25.4

## Silkscreen, mask and mechanical layers (free items; w line width, h text height)
Top Overlay:
  text "CO2 K30" at 4.751,89.55 h2.5 r90
  text "PLANTOWER" at 5.151,62.761 h2.5 r90
  text "BOOT" at 26.702,58.85 h2.3
  text "RESET" at 5.154,58.175 h2.3
  text "12V 1A" at 9.452,8.392 h2
Bottom Overlay:
  text "Version B3 /  / Kimi Izzo / Date: 3/09/24" at 51.62,69.78 h2.5
Top Solder:
  rectangle: 38.2,13.7 41.5,16.6
Mechanical 15:
  circle w0.254: c21.843,122.811 r1.716
  circle w0.254: c33.273,122.811 r1.612
  circle w0.254: c33.273,122.811 r1.617
  circle w0.254: c21.843,122.811 r1.617
  lines w0.254: 4.789,-1.932 13.806,-1.932 13.806,12.419 4.789,12.419 4.789,-1.932 ; 19.648,113.511 35.523,113.511 35.523,126.719 19.648,126.719 19.648,113.511 ; 25.998,130.148 29.173,130.148 29.173,131.926 25.998,131.926 25.998,130.148 ; 44.159,90.27 54.192,90.27 54.192,99.795 44.159,99.795 44.159,90.27
  lines w0.5: 8.558,111.041 8.558,135.043 46.558,135.043 46.558,111.041 ; 8.558,111.042 cw(c7.558,111.042) 7.558,110.042 0.058,110.041 0.058,7.741 3.758,0.041 17.328,0.041 17.328,9.191 cw(c18.328,9.191) 18.328,10.191 ; 18.327,10.189 55.058,10.189 55.058,110.041 47.558,110.041 cw(c47.558,111.042) 46.558,111.042
Mechanical 16:
  lines w0.3: 8.558,111.041 8.558,135.043 46.558,135.043 46.558,111.041 ; 8.558,111.042 cw(c7.558,111.042) 7.558,110.042 0.058,110.041 0.058,7.741 3.758,0.041 17.328,0.041 17.328,9.191 cw(c18.328,9.191) 18.328,10.191 ; 18.327,10.189 55.058,10.189 55.058,110.041 47.558,110.041 cw(c47.558,111.042) 46.558,111.042

## Text inside footprints (layer, text, board x,y; h text height)
J1: Bottom Overlay "1 5 6 7  / 2 3 4 8" at 15.4,101.4 h1.2
J5: Bottom Overlay "+" at 7.388,15.32 h0.8; Bottom Overlay "-" at 12.488,15.353 h0.8
U6: Mechanical 13 "ANTENNA" at 50.958,79.921 h1.78 r270
U12: Top Overlay "K" at 24.887,77.491 h0.8